# EAGLE board wiseboard (EAGLE 8.1.1)

Size 100 x 80 mm. Coordinates in mm from the lower left corner, seen from the top.
Outline: 0,0 100,0 100,80 0,80 0,0
Copper layers (1*16): Top 0.035mm / dielectric 1.5mm / Bottom 0.035mm
Design rules "default": minimum track width 10mil, minimum drill 24mil, track to track 8mil, track to pad 8mil, pad to pad 8mil, via to via 8mil, smd to smd 8mil, copper to edge 40mil, drill to drill 8mil, minimum pad ring 10mil, minimum via ring 8mil, stop-mask expansion 4mil, vias tented up to drill 0mil, thermal gap 10mil

## Footprints (pad centres in the part's own frame; a part is rotated, then mirrored left to right if it is on the bottom)
587-2103-1-ND = smd 1.5 x 4: P$1 -2.55,0; P$2 2.55,0
CHIP-LED0805 = smd 1.2 x 1.2: A 0,-1.05; C 0,1.05
C1206 = smd 1.6 x 1.8: 1 -1.4,0; 2 1.4,0
C0805K = smd 1.1 x 1.4: 1 -1,0; 2 1,0
E5-13 = drill 1.016 pad 2.54: + -2.54,0 | drill 1.016 pad 2.54 octagon: - 2.54,0
JST-PH-2-SMT-RA = smd 1 x 4.6: 1 1,-3.7; 2 -1,-3.7 | smd 1.6 x 3.4: NC1 -3.4,1.5; NC2 3.4,1.5
SOD-123 = smd 1.2 x 0.7: A 1.85,0; C -1.85,0
QFN20 = smd 0.75 x 0.3: 1 -2,1; 2 -2,0.5; 3 -2,0; 4 -2,-0.5; 5 -2,-1; 11 2,-1; 12 2,-0.5; 13 2,0; 14 2,0.5; 15 2,1 | smd 0.3 x 0.75: 6 -1,-2; 7 -0.5,-2; 8 0,-2; 9 0.5,-2; 10 1,-2; 16 1,2; 17 0.5,2; 18 0,2; 19 -0.5,2; 20 -1,2
SO08 = smd 0.6 x 2.2: 1 -1.905,-2.6; 2 -0.635,-2.6; 3 0.635,-2.6; 4 1.905,-2.6; 5 1.905,2.6; 6 0.635,2.6; 7 -0.635,2.6; 8 -1.905,2.6
1X04 = drill 1.016 long: 1 -3.81,0; 2 -1.27,0; 3 1.27,0; 4 3.81,0
1X02 = drill 1.016 long: 1 -1.27,0; 2 1.27,0
SMT-JUMPER_2_NC_PASTE_NO-SILK = smd 0.635 x 1.27: 1 -0.406,0; 2 0.406,0
SOT23 = smd 1 x 1.4: 1 -0.95,-1.306; 2 0.95,-1.306; 3 0,1.306
M1206 = smd 1.6 x 2: 1 -1.4,0; 2 1.4,0
R1206 = smd 1.6 x 1.803: 1 -1.422,0; 2 1.422,0
B3F-10XX = drill 1.016 long: 1 -3.251,2.261; 2 3.251,2.261; 3 -3.251,-2.261; 4 3.251,-2.261
SOP50P490X110-10N = smd 1.397 x 0.279: 1 -2.184,0.991; 2 -2.184,0.508; 3 -2.184,0; 4 -2.184,-0.508; 5 -2.184,-0.991; 6 2.184,-0.991; 7 2.184,-0.508; 8 2.184,0; 9 2.184,0.508; 10 2.184,0.991
SO8 = smd 0.6 x 2.2: 1 -1.905,-2.6; 2 -0.635,-2.6; 3 0.635,-2.6; 4 1.905,-2.6; 5 1.905,2.6; 6 0.635,2.6; 7 -0.635,2.6; 8 -1.905,2.6
HFQ339CT-ND = smd 0.4 x 0.95: GND@1 6.6,-0.925; GND@2 -6,-0.925 | smd 0.3 x 0.8: P$1 -5.4,-1.2; P$3 -4.8,-1.2; P$5 -4.2,-1.2; P$7 -3.6,-1.2; P$9 -3,-1.2; P$11 -2.4,-1.2; P$13 -1.8,-1.2; P$15 -1.2,-1.2; P$17 -0.6,-1.2; P$19 0,-1.2; P$21 0.6,-1.2; P$23 1.2,-1.2; P$25 1.8,-1.2; P$27 2.4,-1.2; P$29 3,-1.2; P$31 3.6,-1.2; P$33 4.2,-1.2; P$35 4.8,-1.2; P$37 5.4,-1.2; P$39 6,-1.2 | smd 0.3 x 0.65: P$2 -5.1,0.838; P$4 -4.5,0.838; P$6 -3.9,0.838; P$8 -3.3,0.838; P$10 -2.7,0.838; P$12 -2.1,0.838; P$14 -1.5,0.838; P$16 -0.9,0.838; P$18 -0.3,0.838; P$20 0.3,0.838; P$22 0.9,0.838; P$24 1.5,0.838; P$26 2.1,0.838; P$28 2.7,0.838; P$30 3.3,0.838; P$32 3.9,0.838; P$34 4.5,0.838; P$36 5.1,0.838; P$38 5.7,0.838
DO214AA = smd 1.8 x 2.2: A 2.55,0; C -2.55,0
SO16 = smd 0.66 x 2.032: 1 -4.445,-3.073; 2 -3.175,-3.073; 3 -1.905,-3.073; 4 -0.635,-3.073; 5 0.635,-3.073; 6 1.905,-3.073; 7 3.175,-3.073; 8 4.445,-3.073; 9 4.445,3.073; 10 3.175,3.073; 11 1.905,3.073; 12 0.635,3.073; 13 -0.635,3.073; 14 -1.905,3.073; 15 -3.175,3.073; 16 -4.445,3.073
SC70-6L = smd 0.35 x 0.8: 1 -0.65,-0.85; 2 0,-0.85; 3 0.65,-0.85; 4 0.65,0.85; 5 0,0.85; 6 -0.65,0.85
SOT95P280X145-5N = smd 1.1 x 0.6: 1 -1.3,0.95; 2 -1.3,0; 3 -1.3,-0.95; 4 1.3,-0.95; 5 1.3,0.95
TRIM_TC33X-2-103E = smd 1.2 x 1.2: 1 -1.8,1; 3 -1.8,-1 | smd 1.5 x 1.6: 2 1.45,0
ESP-12 = smd 2 x 1.2: 1 -7.5,4.5; 2 -7.5,2.5; 3 -7.5,0.5; 4 -7.5,-1.5; 5 -7.5,-3.5; 6 -7.5,-5.5; 7 -7.5,-7.5; 8 -7.5,-9.5; 9 7.5,-9.5; 10 7.5,-7.5; 11 7.5,-5.5; 12 7.5,-3.5; 13 7.5,-1.5; 14 7.5,0.5; 15 7.5,2.5; 16 7.5,4.5

## Placement (x,y rotation side)
22  587-2103-1-ND  [587-2103-1-ND]  30.48,48.26 0 top
BOOT  GREEN  [CHIP-LED0805]  46.99,69.85 0 top
C1  100nF  [C1206]  38.1,26.67 0 top
C2  [C1206]  41.91,10.16 0 top
C3  100nF  [C1206]  88.9,58.42 0 top
C4  [C1206]  88.9,35.56 0 top
C5  4.7pF  [C1206]  77.47,46.99 0 top
C6  100nF  [C1206]  77.47,40.64 0 top
C7  100nF  [C1206]  67.31,27.94 0 top
C8  10uF  [C1206]  59.69,15.24 0 top
C9  10uF/10V  [C0805K]  57.15,19.05 0 top
C10  4700uF/10V  [E5-13]  53.34,44.45 0 top
C11  100nF  [C1206]  11.43,60.96 0 top
C12  100nF  [C1206]  11.43,54.61 0 top
C13  1uF  [C1206]  68.58,7.62 0 top
C16  2u2F  [C1206]  83.82,78.74 0 top
CHRG/LBO  ORANGE  [CHIP-LED0805]  49.53,21.59 0 top
CN1  455-1749-1-ND  [JST-PH-2-SMT-RA]  19.05,12.7 90 top
CN3  455-1749-1-ND  [JST-PH-2-SMT-RA]  45.72,22.86 0 top
D1  MBR120VLSFT1G  [SOD-123]  36.83,58.42 0 top
D2  MBR120  [SOD-123]  57.15,69.85 0 top
D3  1n4148  [SOD-123]  35.56,34.29 0 top
DONE  GREEN  [CHIP-LED0805]  33.02,11.43 0 top
IC1  MCP73871-2CCI/ML-ND  [QFN20]  45.72,19.05 0 top
IC2  LM358MX  [SO08]  68.58,38.1 0 top
JP1  PROG_HEADER  [1X04]  27.94,22.86 0 top
JP2  [1X02]  20.32,55.88 0 top
JP3  JUMPER  [SMT-JUMPER_2_NC_PASTE_NO-SILK]  78.74,78.74 0 top
PWR  RED  [CHIP-LED0805]  29.21,12.7 0 top
Q1  IRLML6402TRPBF  [SOT23]  21.59,36.83 0 top
Q2  IRLML6402TRPBF  [SOT23]  46.99,16.51 0 top
R1  12k  [M1206]  29.21,25.4 0 top
R2  47k  [M1206]  35.56,15.24 0 top
R3  470k  [M1206]  88.9,29.21 0 top
R4  33k  [M1206]  88.9,21.59 0 top
R5  39k  [R1206]  88.9,15.24 0 top
R6  560k  [R1206]  77.47,59.69 0 top
R7  33k  [R1206]  77.47,53.34 0 top
R8  39k  [R1206]  77.47,34.29 0 top
R9  200k  [M1206]  59.69,21.59 0 top
R10  270K  [M1206]  54.61,57.15 0 top
R11  100K  [M1206]  49.53,59.69 0 top
R12  1K  [M1206]  80.01,66.04 0 top
R13  1K  [M1206]  80.01,58.42 0 top
R14  1K  [M1206]  80.01,50.8 0 top
R15  1K  [R1206]  13.97,44.45 0 top
R16  150K  [R1206]  13.97,38.1 0 top
R17  10K  [R1206]  13.97,31.75 0 top
R18  2K  [R1206]  13.97,25.4 0 top
R19  100K  [R1206]  13.97,19.05 0 top
R20  10K  [R1206]  80.01,72.39 0 top
R21  10K  [R1206]  54.61,68.58 0 top
R22  10K  [R1206]  69.85,71.12 0 top
R23  1K  [R1206]  46.99,62.23 0 top
R24  10K  [R1206]  46.99,55.88 0 top
R25  10K  [R1206]  46.99,49.53 0 top
R26  4K7  [M1206]  46.99,31.75 0 top
R27  10K  [M1206]  46.99,24.13 0 top
R28  10k  [M1206]  80.01,43.18 0 top
R29  33k  [M1206]  80.01,35.56 0 top
R30  1K  [M1206]  80.01,27.94 0 top
R31  2k  [M1206]  80.01,20.32 0 top
R32  10k  [M1206]  80.01,12.7 0 top
R33  12k  [M1206]  44.45,36.83 0 top
R34  33k  [M1206]  38.1,38.1 0 top
R35  100k  [M1206]  30.48,38.1 0 top
S1  [B3F-10XX]  45.72,29.21 0 top
S2  [B3F-10XX]  39.37,44.45 0 top
S3  [B3F-10XX]  55.88,45.72 0 top
S4  [B3F-10XX]  39.37,29.21 0 top
S5  [B3F-10XX]  30.48,50.8 0 top
S6  [B3F-10XX]  34.29,30.48 0 top
S7  [B3F-10XX]  30.48,34.29 0 top
U1  LT1945EMSPBF  [SOP50P490X110-10N]  30.48,39.37 0 top
U$2  497-7278-1-ND  [SO8]  45.72,33.02 0 top
U$3  497-7303-1-ND  [SO8]  24.13,24.13 0 top
U$4  HFQ339CT-ND  [HFQ339CT-ND]  50.8,38.1 0 top
U$5  587-2103-1-ND  [587-2103-1-ND]  34.29,21.59 0 top
U$6  SS24  [DO214AA]  90.17,50.8 0 top
U$7  SS24  [DO214AA]  90.17,43.18 0 top
U$8  SS24  [DO214AA]  90.17,7.62 0 top
U$11  1727-3473-ND  [SO16]  27.94,71.12 0 top
U$12  1727-3473-ND  [SO16]  15.24,71.12 0 top
U$13  FSA3157  [SC70-6L]  78.74,6.35 0 top
U$14  AP2112K-3.3TRG1DICT-ND  [SOT95P280X145-5N]  48.26,43.18 0 top
VR1  TC33X-104ECT-ND  [TRIM_TC33X-2-103E]  60.96,29.21 0 top
X1  1528-1438-ND  [ESP-12]  88.9,66.04 0 top

## Library data of the parts
22 U$2-U$8 U$11-U$14 = WISE
BOOT C1-C13 C16 CHRG/LBO CN1 CN3 D2 D3 DONE IC1 PWR R1-R35 X1 = adafruit
D1 = microbuilder
IC2 = linear
JP1 JP2 = pinhead
JP3 = Sparkfun-Passives
Q1 Q2 = IRLML6402; AVAILABILITY: Unavailable; DESCRIPTION: MOSFETs, Semiconductors and Actives, mosfet, Transistors, Discretes (diodes, transistors, thyristors ...); MF: International Rectifier; MP: IRLML6402; PACKAGE: SOT-23-3 International Rectifier; PRICE: None
S1-S7 = switch-omron; MPN: B3F-1000; OC_FARNELL: 176432; OC_NEWARK: 36M3542
U1 = LTC_By_element14_Batch_1; MPN: LT1945EMS#PBF; OC_FARNELL: 1273495; OC_NEWARK: 57M7266; PACKAGE: MSOP-10; SUPPLIER: Linear Technology
VR1 = WISE; AVAILABILITY: Good; DESCRIPTION: Res%20Trimmer%2010K%20Ohm%2025%25%200.1W%281/10W%29%201%28Elec%29/1%28Mech%29Turn%20%283%20X%203.8mm%29%20Foot%20Print%20SMD%20Embossed%20T/R; MF: Bourns; MP: TC33X-2-103E; PACKAGE: None; PRICE: 0.16 USD

## Nets
+3V3: BOOT.A C16.1 Q2.2 R20.2 R21.2 R24.2 R30.2 R31.2 R32.2 R33.2 R34.2 U$13.5 U$14.5 X1.8
+15V: C6.1 IC2.8 R8.2 U$2.1 U$4.P$2
+20V: C4.1 R3.2 U$3.2 U$4.P$24 U$7.A
+24V: U$4.P$23
-15V: C1.1 IC2.4 R5.1 R9.1 U$3.1 U$4.P$1
ADC: C13.1 R26.1 R27.2 R28.2 R29.1 U$13.2 X1.2
BOOSTENA: Q2.1 R2.1 X1.11
CH_PD: R20.1 X1.3
CL: U$4.P$5 X1.13
FB2: C5.2 R6.1 R7.2 U1.5
GND: C1.2 C2.2 C6.2 C7.2 C8.2 C9.2 C10.- C11.2 C12.2 C13.2 C16.2 CN1.1 CN3.2 IC1.10 IC1.11 JP1.4 JP2.2 R4.1 R5.2 R7.1 R8.1 R11.1 R16.2 R17.2 R18.1 R19.1 R25.1 R27.1 R28.1 R35.2 S1.3 S1.4 S2.3 S2.4 U1.3 U1.7 U1.9 U$2.2 U$2.3 U$2.6 U$2.7 U$3.5 U$4.GND@1 U$4.GND@2 U$4.P$3 U$4.P$9 U$4.P$31 U$4.P$34 U$6.C U$11.8 U$12.8 U$14.2 VR1.3 X1.9
GPIO0: R23.1 S1.1 S1.2 X1.12
GPIO2: R24.1
GPIO12: U$12.1 U$13.6 X1.6
GPIO13: U$11.2 U$12.2 X1.7
GPIO14: U$11.3 U$12.3 X1.5
GPIO15: R25.2 X1.10
LE: U$4.P$6 U$12.14
N$1: IC2.3 VR1.2
N$2: 22.P$2 C3.1 U1.10
N$3: Q1.1 R1.2 R2.2
N$4: 22.P$1 C2.1 Q1.3 U1.8 U$5.P$2
N$5: U1.6 U$5.P$1 U$8.A
N$6: C3.2 U$6.A U$7.C
N$7: CN3.1 D1.A
N$8: R9.2 VR1.1
N$9: IC1.2 R10.1 R11.2
N$10: IC1.6 PWR.C
N$11: DONE.C IC1.7
N$12: JP3.1 X1.4
N$13: CHRG/LBO.A R12.1
N$14: DONE.A R13.1
N$15: PWR.A R14.1
N$16: CHRG/LBO.C IC1.8
N$17: C8.1 CN1.2 IC1.14 IC1.15 IC1.16 JP2.1
N$18: IC1.5 R15.2
N$19: R15.1 R16.1 R17.1
N$20: IC1.13 R18.2
N$21: IC1.12 R19.2
N$22: BOOT.C R23.2
N$23: R22.2 U$14.3
N$24: R29.2 U$13.4
N$25: D2.C R22.1
N$26: R35.1 S3.3 S3.4 S4.3 S4.4 S5.3 S5.4 S6.3 S6.4 S7.3 S7.4 U$13.1
N$27: R30.1 S3.1 S3.2
N$29: R31.1 S4.1 S4.2
N$31: R32.1 S5.1 S5.2
N$33: R33.1 S6.1 S6.2
N$35: R34.1 S7.1 S7.2
NEGEN: U1.2 U$12.5
NFB1: C4.2 R3.1 R4.2 U1.1
OE: U$4.P$7 X1.14
POSEN: U1.4 U$12.4
QP0: U$4.P$12 U$11.4
QP1: U$4.P$13 U$11.5
QP2: U$4.P$14 U$11.6
QP2@2: U$4.P$32 U$4.P$37 U$12.6
QP3: U$4.P$15 U$11.7
QP4: U$4.P$16 U$11.14
QP5: U$4.P$17 U$11.13
QP6: U$4.P$18 U$11.12
QP6@2: U$4.P$27 U$4.P$28 U$12.12
QP7: U$4.P$19 U$11.11
QP7@2: U$4.P$33 U$4.P$38 U$12.11
RESET: JP3.2 R21.1 S2.1 S2.2 X1.1
RXD: D3.A X1.15
RXD_5V: D3.C JP1.2
SPH: U$4.P$11 U$12.13
TXD: JP1.1 X1.16
VBAT: D2.A Q1.2 R1.1 U$13.3 U$14.1
VCC: C5.1 C9.1 C10.+ D1.C IC1.3 IC1.4 IC1.9 IC1.17 IC1.18 IC1.19 JP1.3 R6.2 R10.2 R12.2 R13.2 R14.2 U$2.8 U$8.C
VCOMMON: C7.1 IC2.1 IC2.2 U$4.P$22
VDD: C11.1 C12.1 Q2.3 R26.2 U$4.P$4 U$4.P$8 U$4.P$10 U$4.P$29 U$4.P$30 U$4.P$35 U$4.P$36 U$11.1 U$11.15 U$11.16 U$12.15 U$12.16

## Tracks (layer width: path | path; a pad name or v marks a point on that pad's centre or on a via)
+3V3  (13 unrouted)
+15V  (4 unrouted)
+20V  (4 unrouted)
-15V  (5 unrouted)
ADC  (6 unrouted)
BOOSTENA  (2 unrouted)
CH_PD  (1 unrouted)
CL  (1 unrouted)
FB2  (3 unrouted)
GND  (53 unrouted)
GPIO0  (3 unrouted)
GPIO12  (2 unrouted)
GPIO13  (2 unrouted)
GPIO14  (2 unrouted)
GPIO15  (1 unrouted)
LE  (1 unrouted)
N$1  (1 unrouted)
N$2  (2 unrouted)
N$3  (2 unrouted)
N$4  (4 unrouted)
N$5  (2 unrouted)
N$6  (2 unrouted)
N$7  (1 unrouted)
N$8  (1 unrouted)
N$9  (2 unrouted)
N$10  (1 unrouted)
N$11  (1 unrouted)
N$12  (1 unrouted)
N$13  (1 unrouted)
N$14  (1 unrouted)
N$15  (1 unrouted)
N$16  (1 unrouted)
N$17  (5 unrouted)
N$18  (1 unrouted)
N$19  (2 unrouted)
N$20  (1 unrouted)
N$21  (1 unrouted)
N$22  (1 unrouted)
N$23  (1 unrouted)
N$24  (1 unrouted)
N$25  (1 unrouted)
N$26  (11 unrouted)
N$27  (2 unrouted)
N$29  (2 unrouted)
N$31  (2 unrouted)
N$33  (2 unrouted)
N$35  (2 unrouted)
NEGEN  (1 unrouted)
NFB1  (3 unrouted)
OE  (1 unrouted)
POSEN  (1 unrouted)
QP0  (1 unrouted)
QP1  (1 unrouted)
QP2  (1 unrouted)
QP2@2  (2 unrouted)
QP3  (1 unrouted)
QP4  (1 unrouted)
QP5  (1 unrouted)
QP6  (1 unrouted)
QP6@2  (2 unrouted)
QP7  (1 unrouted)
QP7@2  (2 unrouted)
RESET  (4 unrouted)
RXD  (1 unrouted)
RXD_5V  (1 unrouted)
SPH  (1 unrouted)
TXD  (1 unrouted)
VBAT  (4 unrouted)
VCC  (17 unrouted)
VCOMMON  (3 unrouted)
VDD  (15 unrouted)